# Altium PCB PCB_涂鸦拓展板_2021-06-02.pcbdoc
Units mil, origin at the board's own origin, x right, y up, seen from the top; angles counter-clockwise.
Board outline 3970 x 3137.5 mil, 2 copper layers (Top Layer, Bottom Layer); 29 components, 20 nets, 117 pads, 12 vias.
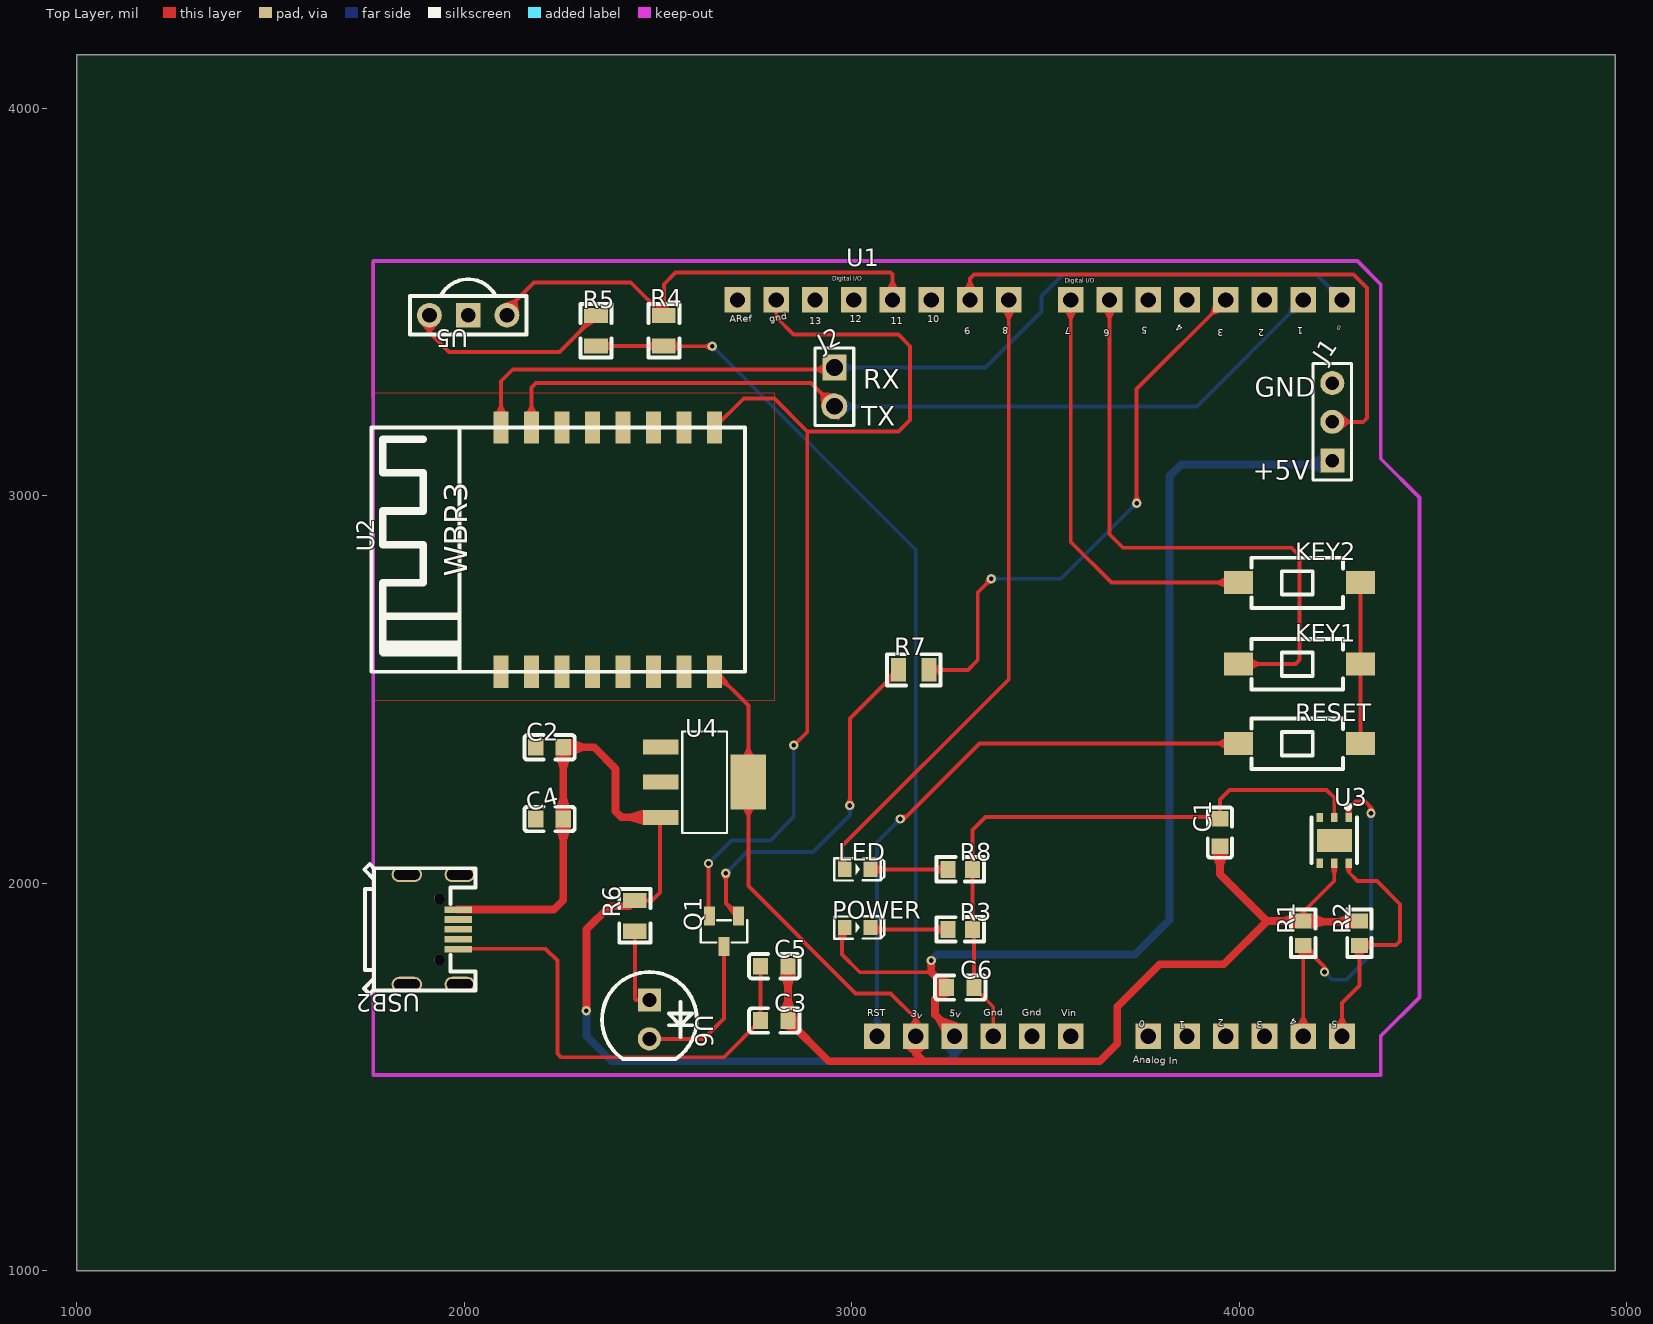
[diagram p0: Top Layer view]
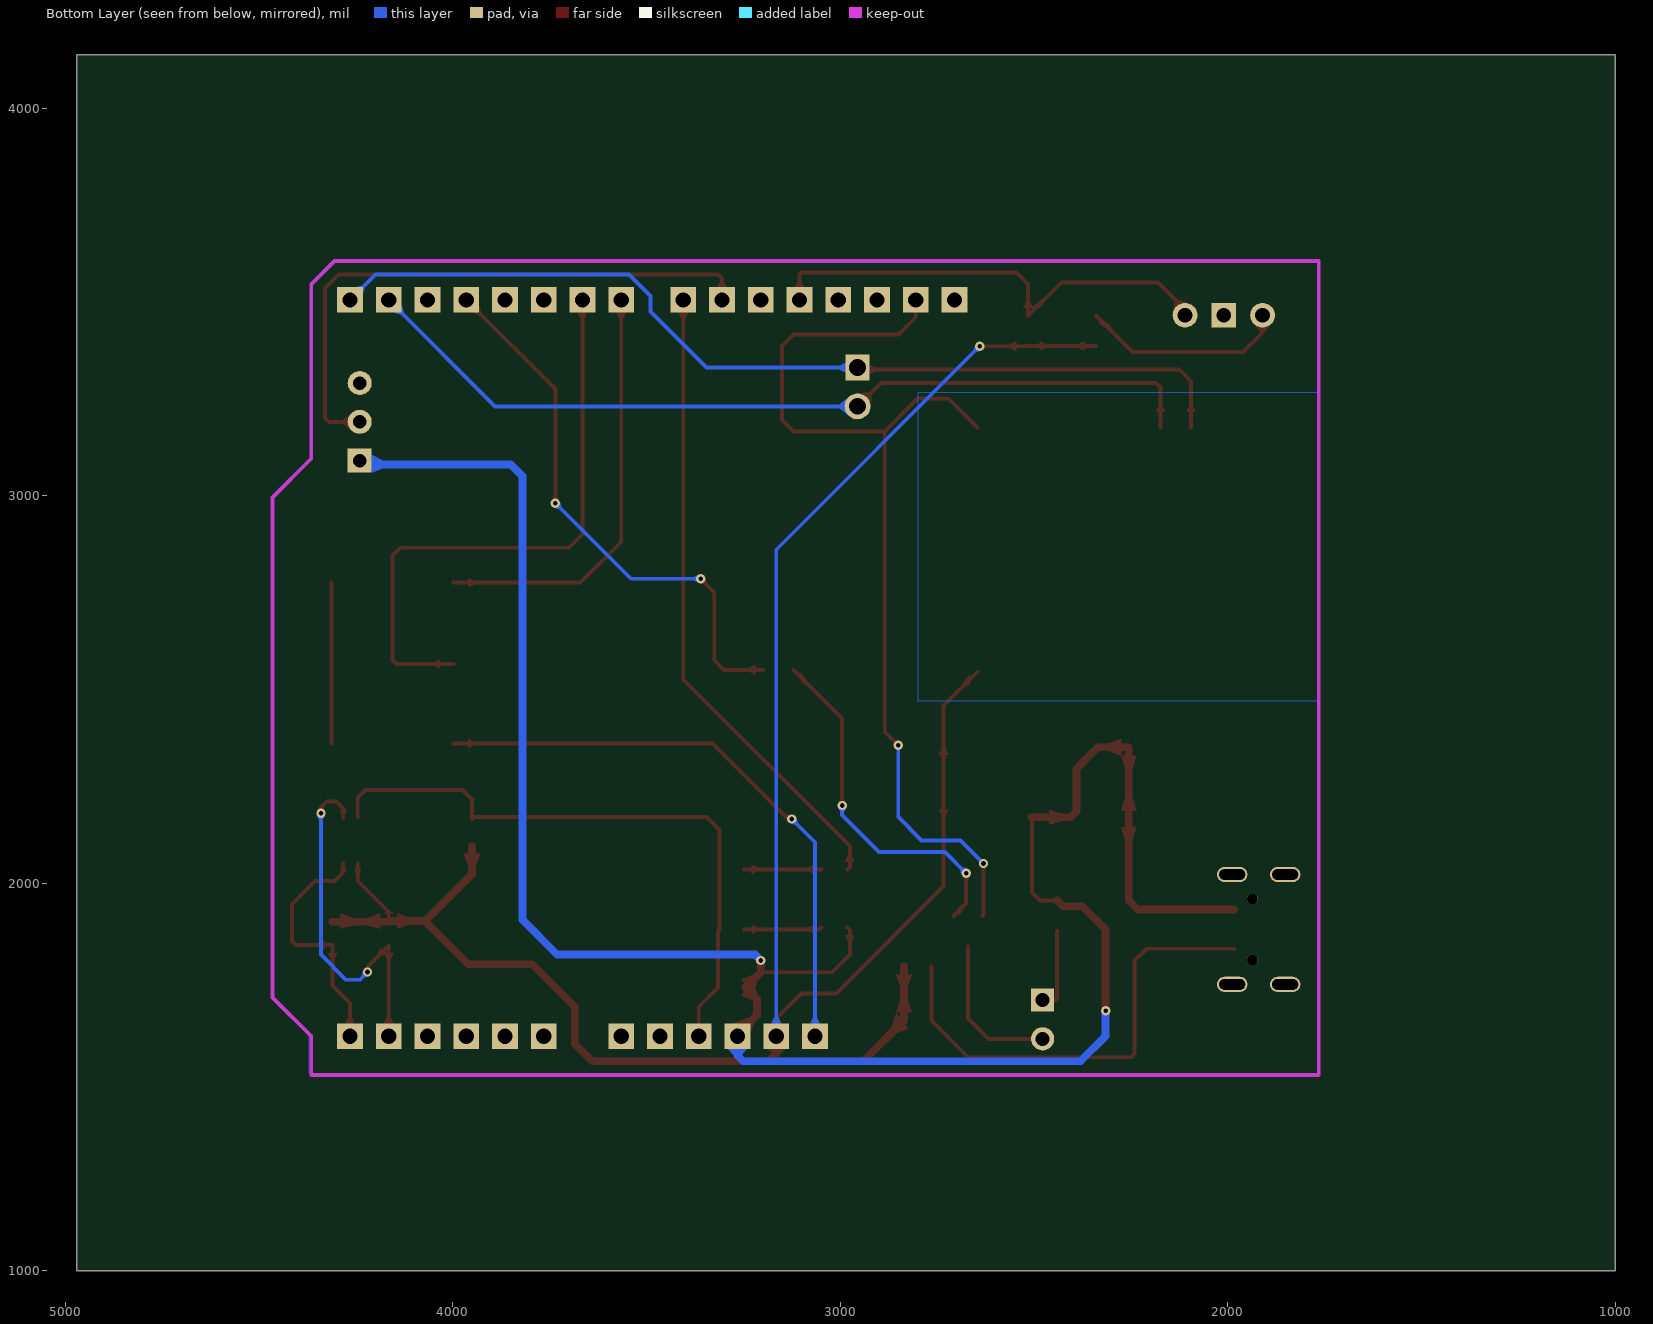
[diagram p1: Bottom Layer view, seen from below]

## Layer stack, top to bottom
Top Layer: signal copper (thickness not stored)
Dielectric: dielectric 12.6, FR-4, Dk 4.8
Bottom Layer: signal copper (thickness not stored)

## Board outline
4970,1000 1000,1000 1000,4137.5 4970,4137.5

## Components (designator, comment, footprint, x,y, rotation, side; value= is the part's Value field where it differs from the comment)
C1 "100nf" C0603 3950,2130.4 r90 top
C2 "100nf" C0603 2220,2350.4 r0 top
C3 "100nf" C0603 2800,1645.4 r0 top
C4 "10uf" C0603 2220,2165.4 r0 top
C5 "10uf" C0603 2800,1785.4 r0 top
C6 "100nf" C0603 3280,1730.4 r0 top
J1 "HDR-M-2.54_1x3" HDR-M-2.54_1X3 4240,3190.4 r90 top
J2 "HDR-M-2.54_1x2" HDR-M-2.54_1X2 2955,3280.4 r270 top
KEY1 "TS-1101-C-W" SW-SMD_L6.0-W3.3-LS8.0 4155,2565.4 r0 top
KEY2 "TS-1101-C-W" SW-SMD_L6.0-W3.3-LS8.0 4155,2775.4 r0 top
LED "LED-0603_G" LED0603_GREEN 3015,2035.4 r0 top
POWER "LED-0603_R" LED0603_RED 3015,1885.4 r0 top
Q1 "SS8050_C746284" SOT-23-3_L2.9-W1.3-P1.90-LS2.4-BR 2670,1875.4 r90 top
R1 "4.7k" R0603 4165,1870.4 r90 top
R2 "4.7k" R0603 4310,1870.4 r90 top
R3 "4.7k" R0603 3280,1880.4 r0 top
R4 "10K" R0805 2515,3425.4 r90 top
R5 "120" R0805 2340,3425.4 r270 top
R6 "120" R0805 2440,1915.4 r90 top
R7 "4.7k" R0805 3160,2550.4 r180 top
R8 "4.7k" R0603 3280,2035.4 r0 top
RESET "TS-1101-C-W" SW-SMD_L6.0-W3.3-LS8.0 4155,2360.4 r0 top
U1 "ARDUINO" ARDUINO 1765,1505 r0 top
U2 "WBR3" WBR3 2705,2545.4 r90 top
U3 "SHT20" DFN-6_L3.0-W3.0-P0.95-TR-EP 4245,2110.4 r0 top
U4 "AMS1117-3.3" SOT-223-3_L6.5-W3.4-P2.30-LS7.0-BR 2620,2260.4 r180 top
U5 "HX1838" HX1838 2010,3465.4 r180 top
U6 "红外发射管5mm" 123 2480,1650.4 r270 top
USB2 "U-F-M5DD-Y-1" MICRO-USB-SMD_U-F-M5DD-Y-1 1920,1880.4 r180 top

## Footprints (in the part's own frame and the unit in brackets; to place one, negate y for a bottom-side part, rotate by r counter-clockwise, add the part's x,y. Pads: shape width x height; smd on the part's side, far side on the other; paste and mask are expansions set on the pad)
123 [mil]
  rect 60x60 hole 36: 1(-47.64,-2.34)
  round 60 hole 36: 2(52.36,-2.34)
  silkscreen extent -120,-125 105,120
ARDUINO [mil]
  rect 66x66 hole 39.4: 3V(1400,100) 5V(1500,100) A0(2000,100) A1(2100,100) A2(2200,100) A3(2300,100) A4(2400,100) A5(2500,100) AREF(940,2000) D0(2500,2000) D1(2400,2000) D2(2300,2000) D3(2200,2000) D4(2100,2000) D5(2000,2000) D6(1900,2000) D7(1800,2000) D8(1640,2000) D9(1540,2000) D10(1440,2000) D11(1340,2000) D12(1240,2000) D13(1140,2000) GND(1040,2000) GND1(1700,100) GND2(1600,100) RESET(1300,100) VIN(1800,100)
  Keep-Out Layer lines w10: 0,0 2600,0 2600,100 2700,200 2700,1490 2600,1590 2600,2040 2540,2100 0,2100 0,0
C0603 [mm]
  rect 1x1.1 smd: 1(-0.9,0) 2(0.9,0)
  silkscreen extent -1.65,-0.8 1.65,0.8
DFN-6_L3.0-W3.0-P0.95-TR-EP [mm]
  rect 0.4x0.6 smd: 1(0.95,1.502) 2(0,1.501) 3(-0.95,1.5) 4(-0.95,-1.501) 5(0,-1.502) 6(0.95,-1.501)
  rect 2.3x1.5 smd: 7(0.004,-0.001)
  silkscreen extent -1.5,-1.5 1.5,2.34
HDR-M-2.54_1X2 [mm]
  rect 1.7x1.575 hole 1.1: 1(-1.27,0)
  round 1.7 hole 1.1: 2(1.27,0)
  silkscreen extent -2.54,-1.27 2.54,1.27
HDR-M-2.54_1X3 [mil]
  rect 62x62 hole 35: 1(-100,0)
  round 62 hole 35: 2(0,0) 3(100,0)
  silkscreen extent -150,-50 150,50
HX1838 [mil]
  round 64 hole 38: 1(-100,0) 3(100,0)
  rect 64x64 hole 38: 2(0,0)
  silkscreen extent -150,-93 150,50
LED0603_GREEN [mm]
  rect 0.9x1 smd: 1(-0.85,0) 2(0.85,0)
  silkscreen extent -1.54,-0.73 1.75,0.73
LED0603_RED [mm]
  rect 0.9x1 smd: 1(-0.85,0) 2(0.85,0)
  silkscreen extent -1.54,-0.73 1.75,0.73
MICRO-USB-SMD_U-F-M5DD-Y-1 [mm]
  rect 1.8x0.43 smd: 1(-1.626,-1.3) 2(-1.626,-0.65) 3(-1.626,0) 4(-1.626,0.65) 5(-1.626,1.3)
  oval 2x1 hole 0.7 slot 1.7 at 0 deg: 6(-1.735,3.599) 7(1.735,3.6) 8(-1.735,-3.599) 9(1.735,-3.6)
  round 0.7 hole 0.7 unplated: ""(-0.415,2) ""(-0.415,-2)
  silkscreen extent -2.77,-4.28 4.55,4.22
R0603 [mm]
  rect 1x1.1 smd: 1(-0.8,0) 2(0.8,0)
  silkscreen extent -1.55,-0.8 1.55,0.81
R0805 [mm]
  rect 1x1.55 smd: 1(-1,0) 2(1,0)
  silkscreen extent -1.75,-1.02 1.75,1.02
SOT-23-3_L2.9-W1.3-P1.90-LS2.4-BR [mm]
  rect 1.25x0.7 smd: 1(1,-0.95) 2(1,0.95) 3(-1,0)
  silkscreen extent -0.73,-1.53 0.73,1.53
SOT-223-3_L6.5-W3.4-P2.30-LS7.0-BR [mm]
  rect 2.34x0.98 smd: 1(2.87,-2.3) 2(2.87,0) 3(2.87,2.3)
  rect 2.34x3.6 smd: 4(-2.87,0)
  silkscreen extent -1.47,-3.33 1.47,3.33
SW-SMD_L6.0-W3.3-LS8.0 [mm]
  rect 1.9x1.5 smd: 1(-4,0) 2(4,0)
  silkscreen extent -3.14,-1.67 2.86,1.63
WBR3 [mm]
  rect 2.1x1 smd: 1(0,15.5) 2(0,13.5) 3(0,11.5) 4(0,9.5) 5(0,7.5) 6(0,5.5) 7(0,3.5) 8(0,1.5) 9(16,1.5) 10(16,3.5) 11(16,5.5) 12(16,7.5) 13(16,9.5) 14(16,11.5) 15(16,13.5) 16(16,15.5)
  silkscreen extent 0,-0.5 16,24

## Via types
v1: diameter 24, hole 12, Top Layer to Bottom Layer, 12 vias

## Nets (pads, with @x,y where several pads share a name; then routed paths per layer and width w, separated by ;. In a path a pad name is that pad's centre, name@x,y a point inside that pad or via, vN(x,y) a via of type N, cw(c..) or ccw(c..) an arc to the next point about the centre after c; other vN are vias at no path point)
+3.3V: C1.1 C3.2 C5.2 R1.2 R2.2 R4.1 R5.2 U1.3V U2.8 U3.5 U4.4 | length 5882.7
  Top Layer w10: R5.2 R4.1 2515.6,3385.4 v1(2640,3385.4) ; U2.8@2646,2545.4 2733,2458.4 U4.4 2733,1992.4 3010,1715.4 3100,1715.4 3165,1650.4 U1.3V ; R1.2 4165,1925.4 4245,2005.4 U3.5
  Top Layer w20: C5.2 C3.2 2940.4,1540.4 3199.2,1540.4 ; U1.3V 3165,1560.4 3185,1540.4 3640,1540.4 3685,1585.4 3685,1680.4 3795,1790.4 3960,1790.4 4071.5,1901.9 ; C1.1 3950,2023.4 4071.5,1901.9 ; R1.2@4165,1900.4 R2.2@4310,1900.4 ; R1.2 4071.5,1901.9
  Bottom Layer w10: v1(2640,3385.4) 3165,2860.4 U1.3V
+5V: C2.2 C4.2 C6.1 J1.1 POWER.1 R6.2 U1.5V U4.3 USB2.1 | length 5605.3
  Top Layer w10: R6.2 2484.37,1954.77 2505,1975.4 2505,2167.84 U4.3@2507.01,2169.85 ; POWER.1 2975,1878.9 2975,1815.4 3020.4,1770 3205,1770
  Top Layer w20: USB2.1 2231.2,1931.6 2255,1955.4 C4.2 C2.2 2335,2350.4 2390,2295.4 2390,2185.4 2405.6,2169.9 U4.3@2507,2169.9 ; v1(2315,1670.4) 2315,1880.4 2375,1940.4 2425.63,1940.4 R6.2 ; v1(3205,1800.4) 3205,1770 C6.1 3215,1700.8 3215,1660.4 3265,1610.4 U1.5V
  Bottom Layer w20: v1(2315,1670.4) 2315,1605.4 2380,1540.4 3250,1540.4 3265,1555.4 U1.5V ; v1(3205,1800.4) 3220,1815.4 3730,1815.4 3820,1905.4 3820,3050.4 3850,3080.4 4230,3080.4 J1.1
DATA: J1.2 U1.D9 | length 1528.2
  Top Layer w10: U1.D9 3305,3560.4 3315,3570.4 4295,3570.4 4330,3535.4 4330,3200.4 4320,3190.4 J1.2
EMIT: R7.1 U1.D3 | length 1436.1
  Top Layer w10: R7.1 3300,2550.4 3325,2575.4 3325,2750.4 v1(3360,2785.4) ; v1(3735,2980.4) 3735,3275 U1.D3
  Bottom Layer w10: v1(3360,2785.4) 3540,2785.4 v1(3735,2980.4)
GND: C1.2 C2.1 C3.1 C4.1 C5.1 C6.2 J1.3 KEY1.2 KEY2.2 Q1.2 R3.2 R8.2 RESET.2 U1.GND U1.GND1 U1.GND2 U2.9 U3.2 U4.1 U5.2 USB2.5 | length 5863.8
  Top Layer w10: USB2.5 1985.21,1830.4 2210,1830.4 2240,1800.4 2240,1560.4 2250,1550.4 2669.57,1550.4 C3.1 C5.1 ; v1(2630,2050.4) 2630,1995.4 2630,1917.37 Q1.2 ; U2.9@2645.95,3175.32 2721.03,3250.4 2800,3250.4 2885,3165.4 ; U1.GND 2805,3460.4 2850,3415.4 3120,3415.4 3150,3385.4 3150,3195.4 3120,3165.4 2885,3165.4 ; v1(2850,2355.4) 2885,2390.4 2885,3165.4 ; U1.GND2 3365,1680.84 C6.2 3315.43,1876.46 R3.2 R8.2 3311.49,2136.89 3345,2170.4 3945.43,2170.4 C1.2 3950,2215.4 3975,2240.4 4225,2240.4 4245,2220.4 U3.2 ; RESET.2 KEY1.2 KEY2.2
  Bottom Layer w10: v1(2630,2050.4) 2690,2110.4 2790,2110.4 2850,2170.4 v1(2850,2355.4)
KEY1: KEY1.1 U1.D6 | length 1549
  Top Layer w10: U1.D6 3665,2900.4 3700,2865.4 4135,2865.4 4155,2845.4 4155,2575.4 4145,2565.4 KEY1.1
KEY2: KEY2.1 U1.D7 | length 1100.6
  Top Layer w10: U1.D7 3565,2880.4 3670,2775.4 KEY2.1
LED: LED.1 U1.D8 | length 1650.4
  Top Layer w10: LED.1 2975,2041.9 2975,2095.4 3405,2525.4 U1.D8
LED1_2: POWER.2 R3.1 | length 202.1
  Top Layer w10: POWER.2 3053.5,1880.4 R3.1
R5_1: R5.1 U5.3 | length 534.8
  Top Layer w10: U5.3 1910,3420.4 1960,3370.4 2245.6,3370.4 R5.1
R6_1: R6.1 U6.1 | length 214.3
  Top Layer w10: R6.1 2440,1700.4 2442.36,1698.04 U6.1
R7_2: Q1.1 R7.2 | length 933.2
  Top Layer w10: v1(2675,2025.4) 2675,1947.2 Q1.1 ; v1(2995,2200.4) 2995,2424.8 R7.2
  Bottom Layer w10: v1(2675,2025.4) 2730,2080.4 2900,2080.4 2995,2175.4 v1(2995,2200.4)
R8_1: LED.2 R8.1 | length 200
  Top Layer w10: LED.2 R8.1
REC: R4.2 U1.D11 U5.1 | length 1234.9
  Top Layer w10: U5.1 2110,3480.4 2180,3550.4 2429.4,3550.4 R4.2 2515,3545.4 2545,3575.4 3100,3575.4 3105,3570.4 U1.D11
RESET: RESET.1 U1.RESET | length 1538.5
  Top Layer w10: v1(3125,2165.4) 3135,2165.4 3330,2360.4 RESET.1
  Bottom Layer w10: U1.RESET 3065,2105.4 v1(3125,2165.4)
RX: J2.1 U1.D0 U2.16 | length 2454.6
  Top Layer w10: U2.16 2094.8,3295.2 2125,3325.4 2950,3325.4 J2.1
  Bottom Layer w10: J2.1 3345,3330.4 3490,3475.4 3490,3515.4 3545,3570.4 4199.6,3570.4 U1.D0
SCL: R2.1 U1.A5 U3.6 | length 647.4
  Top Layer w10: U1.A5 4265,1690.4 4310,1735.4 R2.1 4311.5,1840.4 4405,1840.4 4415,1850.4 4415,1945.4 4355,2005.4 4305,2005.4 4282.4,2028 U3.6
SDA: R1.1 U1.A4 U3.1 | length 954.8
  Top Layer w10: U1.A4 R1.1 4220,1783.9 v1(4220,1770.4) ; U3.1 4282.4,2192.8 4300,2210.4 4325,2210.4 4340,2195.4 v1(4340,2180.4)
  Bottom Layer w10: v1(4220,1770.4) 4240,1750.4 4275,1750.4 4340,1815.4 v1(4340,2180.4)
TX: J2.2 U1.D1 U2.15 | length 2272.6
  Top Layer w10: U2.15 2173.5,3278.9 2185,3290.4 2895,3290.4 J2.2 2955,3210.4 J2.2@2965,3200.4
  Bottom Layer w10: J2.2 3890.4,3230.4 U1.D1
U6_2: Q1.3 U6.2 | length 399.7
  Top Layer w10: U6.2 2617.64,1598.04 2670,1650.4 Q1.3
pads on no net: U1.A0 U1.A1 U1.A2 U1.A3 U1.AREF U1.D2 U1.D4 U1.D5 U1.D10 U1.D12 U1.D13 U1.VIN U2.1 U2.2 U2.3 U2.4 U2.5 U2.6 U2.7 U2.10 U2.11 U2.12 U2.13 U2.14 U3.3 U3.4 U3.7 U4.2 USB2. USB2.2 USB2.3 USB2.4 USB2.6 USB2.7 USB2.8 USB2.9

## Polygon pours and split planes (outlines as drawn)
GND on Top Layer (solid): 1765,3605.4 1760,3600.4 1760,3255.4 1770,3265.4 2800,3265.4 2800,2470.4 1765,2470.4 1765,1505.4 4365,1505.4 4365,1605.4 4465,1705.4 4465,2995.4 4365,3095.4 4365,3545.4 4305,3605.4 1765,3605.4
GND on Bottom Layer (solid): 1765,3605.4 1765,3265.4 2800,3265.4 2800,2470.4 1765,2470.4 1765,1510.4 1770,1505.4 4365,1505.4 4370,1510.4 4370,1605.4 4465,1700.4 4465,1705.4 4465,3000.4 4370,3095.4 4365,3095.4 4365,3550.4 4310,3605.4 4305,3605.4 1765,3605.4

## Other copper
Top Layer:
  region net REC: 2141.46,3471.23 2100.28,3495.89 2127.96,3505.43 2136.8,3500.13
  region net R5_1: 1934,3444.23 1886,3444.23 1905,3421.83 1915,3421.83
  region net TX: 2921.6,3228.3 2957.1,3263.8 2926.32,3266.15 2919.25,3259.08
  region net DATA: 4260.5,3167.15 4260.5,3213.65 4282.2,3195.4 4282.2,3185.4
  region net SDA: 4331,2188.34 4349,2188.34 4345,2195.4 4335,2195.4
  region net EMIT: 3360.75,2773.42 3348.02,2786.15 3344.91,2777.38 3351.98,2770.31
  region net EMIT: 3726,2988.34 3744,2988.34 3740,2996.74 3730,2996.74
  region net RESET: 3135.47,2159.54 3129.51,2176.52 3138.58,2176.05 3142.25,2165.58
  region net R7_2: 2986,2208.34 3004,2208.34 3000,2216.74 2990,2216.74
  region net R7_2: 2666,2017.46 2684,2017.46 2680,2009.06 2670,2009.06
  region net +5V: 3196,1792.46 3214,1792.46 3215,1784.06 3195,1784.06
  region net +3.3V: 2632.06,3376.4 2632.06,3394.4 2623.66,3390.4 2623.66,3380.4
  region net SDA: 4211,1778.34 4229,1778.34 4225,1783.91 4215,1783.91
  region net LED1_2: 3066.18,1892.9 3066.18,1867.9 3081.18,1875.4 3081.18,1885.4
  region net +5V: 2987.5,1865.71 2963.82,1865.71 2970,1850.71 2980,1850.71
  region net +3.3V: 2665.63,2538.22 2665.63,2513.22 2680.63,2503.65 2680.63,2517.79
  region net RX: 2082.27,3216.66 2107.27,3216.66 2099.77,3231.66 2089.77,3231.66
  region net TX: 2161.01,3216.66 2186.01,3216.66 2178.51,3231.66 2168.51,3231.66
  region net +3.3V: 2815.75,1667.05 2855.12,1667.05 2845.43,1697.05 2825.43,1697.05
  region net +3.3V: 2855.12,1663.63 2824.97,1623.75 2854.13,1612.57 2866.3,1628.67
  region net +5V: 3255.04,1708.75 3224.88,1748.63 3213.7,1713.67 3225.88,1697.57
  region net +5V: 3224.88,1712.17 3255.04,1752.05 3225.88,1763.23 3213.7,1747.13
  region net +3.3V: 3971.66,2075.28 3928.34,2075.28 3940,2045.28 3960,2045.28
  region net +5V: 2275.12,2328.75 2235.75,2328.75 2245.43,2298.75 2265.43,2298.75
  region net +5V: 2275.12,2372.05 2275.12,2328.75 2305.12,2340.4 2305.12,2360.4
  region net +3.3V: 2855.12,1763.75 2815.75,1763.75 2825.43,1733.75 2845.43,1733.75
  region net +5V: 2275.12,2143.75 2235.75,2143.75 2245.33,2113.75 2265.33,2113.75
  region net +5V: 2235.75,2187.05 2275.12,2187.05 2265.43,2217.05 2245.43,2217.05
  region net R7_2: 2693.62,1916.05 2693.62,1939.38 2678.62,1950.62 2678.62,1936.48
  region net KEY2: 3960.12,2762.9 3960.12,2787.9 3945.12,2780.4 3945.12,2770.4
  region net RESET: 3960.12,2347.9 3960.12,2372.9 3945.12,2365.4 3945.12,2355.4
  region net KEY1: 4034.92,2577.9 4034.92,2552.9 4049.92,2560.4 4049.92,2570.4
  region net RX: 2924,3312.9 2924,3337.9 2909,3330.4 2909,3320.4
  region net +3.3V: 4288.34,1882.21 4288.34,1921.58 4258.34,1910.4 4258.34,1890.4
  region net SCL: 4322.5,1819.22 4297.5,1819.22 4305,1804.22 4315,1804.22
  region net SCL: 4331.66,1852.9 4331.66,1827.9 4346.66,1835.4 4346.66,1845.4
  region net LED1_2: 3228.82,1867.9 3228.82,1892.9 3213.82,1885.4 3213.82,1875.4
  region net R8_1: 3228.82,2022.9 3228.82,2047.9 3213.82,2040.4 3213.82,2030.4
  region net +3.3V: 4152.5,1921.58 4177.5,1921.58 4170,1925.4 4160,1925.4
  region net +3.3V: 4186.66,1921.58 4186.66,1882.21 4216.66,1890.4 4216.66,1910.4
  region net +3.3V: 4143.34,1882.21 4143.34,1921.58 4113.34,1911.9 4113.34,1891.9
  region net SDA: 4186.66,1831.51 4164.88,1819.22 4184.03,1812.8 4193.07,1817.9
  region net SDA: 4177.5,1819.22 4152.5,1819.22 4160,1804.22 4170,1804.22
  region net +5V: 2460.95,2189.14 2460.95,2150.56 2430.95,2159.85 2430.95,2179.85
  region net +3.3V: 2745.49,2189.53 2720.49,2189.53 2727.99,2174.53 2737.99,2174.53
  region net +3.3V: 2720.49,2331.27 2745.49,2331.27 2737.99,2346.27 2727.99,2346.27
  region net R8_1: 3066.17,2047.9 3066.17,2022.9 3081.17,2030.4 3081.17,2040.4
  region net LED: 2963.81,2055.09 2987.5,2055.09 2980,2070.09 2970,2070.09
  region net R7_2: 3100.95,2519.89 3100.95,2543.22 3085.95,2522.79 3085.95,2508.65
  region net EMIT: 3219.05,2562.9 3219.05,2537.9 3234.05,2545.4 3234.05,2555.4
  region net +3.3V: 2370.51,3398.53 2370.51,3373.53 2385.51,3381.03 2385.51,3391.03
  region net R5_1: 2332.81,3445.09 2309.49,3445.09 2298.24,3430.09 2312.39,3430.09
  region net REC: 2502.5,3484.46 2527.5,3484.46 2520,3499.46 2510,3499.46
  region net REC: 2484.49,3484.46 2507.81,3484.46 2487.39,3499.46 2473.24,3499.46
  region net +3.3V: 2545.51,3397.9 2545.51,3372.9 2560.51,3380.4 2560.51,3390.4
  region net +3.3V: 2484.49,3373.53 2484.49,3398.53 2469.49,3391.03 2469.49,3381.03
  region net SDA: 4274.53,2181.35 4290.27,2181.35 4287.4,2192.8 4277.4,2192.8
  region net SCL: 4290.27,2039.5 4274.53,2039.5 4277.4,2028 4287.4,2028
  region net +3.3V: 4252.87,2039.45 4237.13,2039.45 4240,2024.45 4250,2024.45
  region net EMIT: 3949.67,3472 3932,3489.68 3926.7,3473.77 3933.77,3466.7
  region net KEY1: 3677.5,3472 3652.5,3472 3660,3457 3670,3457
  region net KEY2: 3577.5,3472 3552.5,3472 3560,3457 3570,3457
  region net LED: 3417.5,3472 3392.5,3472 3400,3457 3410,3457
  region net DATA: 3292.5,3538 3317.5,3538 3310,3553 3300,3553
  region net REC: 3092.5,3538 3117.5,3538 3110,3553 3100,3553
  region net SDA: 4152.5,1638 4177.5,1638 4170,1653 4160,1653
  region net SCL: 4252.5,1638 4277.5,1638 4270,1653 4260,1653
  region net +5V: 3232,1617.58 3277.64,1638 3236.9,1652.64 3217.36,1643.89
  region net +3.3V: 3152.5,1638 3177.5,1638 3170,1650.4 3160,1650.4
  region net +3.3V: 3190,1572 3140,1572 3155,1560.4 3175,1560.4
Bottom Layer:
  region net TX: 2977.13,3205.3 2977.13,3255.5 3000.56,3235.4 3000.56,3225.4
  region net SDA: 4331,2172.46 4349,2172.46 4345,2164.06 4335,2164.06
  region net EMIT: 3367.94,2776.4 3367.94,2794.4 3376.34,2790.4 3376.34,2780.4
  region net EMIT: 3735.75,2968.42 3723.02,2981.15 3719.91,2972.38 3726.98,2965.31
  region net RESET: 3125.75,2153.42 3113.02,2166.15 3109.91,2157.38 3116.98,2150.31
  region net R7_2: 2986,2192.46 3004,2192.46 3000,2184.06 2990,2184.06
  region net R7_2: 2686.98,2024.65 2674.25,2037.38 2683.02,2040.49 2690.09,2033.42
  region net +5V: 2306,1662.46 2324,1662.46 2325,1654.06 2305,1654.06
  region net +5V: 3216.98,1799.65 3204.25,1812.38 3209.48,1819.02 3223.62,1804.88
  region net +3.3V: 2651.98,3386.15 2639.25,3373.42 2648.02,3370.31 2655.09,3377.38
  region net SDA: 4231.98,1771.15 4219.25,1758.42 4228.02,1755.31 4235.09,1762.38
  region net RX: 2986,3342.9 2986,3317.9 3001,3325.4 3001,3335.4
  region net +5V: 4209,3059.4 4209,3105.4 4179,3090.4 4179,3070.4
  region net TX: 4149.67,3472 4132,3489.68 4126.7,3473.77 4133.77,3466.7
  region net RX: 4232,3520.32 4249.67,3538 4233.77,3543.3 4226.7,3536.23
  region net +5V: 3290,1572 3240,1572 3255,1555.4 3275,1555.4
  region net +3.3V: 3152.5,1638 3177.5,1638 3170,1653 3160,1653
  region net RESET: 3052.5,1638 3077.5,1638 3070,1653 3060,1653

## Silkscreen, mask and mechanical layers (free items; w line width, h text height)
Top Overlay:
  text "RX" at 3030,3275.4 h50
  text "GND" at 4040,3255.4 h50
  text "TX" at 3025,3180.4 h50
  text "+5V" at 4035,3040.4 h50
  text "Gnd" at 3440,1650.4 h30 r2

## Text inside footprints (layer, text, board x,y; h text height)
U1: Top Overlay "RST" at 3040,1650.4 h30; Top Overlay "3v" at 3150,1650.4 h30 r345; Top Overlay "5v" at 3250,1650.4 h30 r352; Top Overlay "Gnd" at 3340,1650.4 h30 r2; Top Overlay "Vin" at 3540,1650.4 h30; Top Overlay "Analog In" at 3725,1530.4 h30 r358; Top Overlay "0" at 3760,1650.4 h30 r167; Top Overlay "1" at 3860,1650.4 h30 r180; Top Overlay "2" at 3960,1655.4 h30 r180; Top Overlay "3" at 4060,1650.4 h30 r178; Top Overlay "4" at 4155,1650.4 h30 r145; Top Overlay "5" at 4255,1650.4 h30 r172; Top Overlay "ARef" at 2685,3440.4 h30 r1; Top Overlay "gnd" at 2790,3440.4 h30 r10; Top Overlay "13" at 2890,3435.4 h30 r359; Top Overlay "12" at 2995,3440.4 h30; Top Overlay "11" at 3100,3435.4 h30; Top Overlay "10" at 3195,3440.4 h30 r359; Top Overlay "9" at 3305,3440.4 h30 r186; Top Overlay "8" at 3405,3440.4 h30 r177; Top Overlay "7" at 3565,3440.4 h30 r180; Top Overlay "6" at 3665,3435.4 h30 r184; Top Overlay "5" at 3765,3440.4 h30 r172; Top Overlay "4" at 3860,3440.4 h30 r145; Top Overlay "3" at 3960,3435.4 h30 r178; Top Overlay "2" at 4065,3435.4 h30 r180; Top Overlay "1" at 4165,3440.4 h30 r180; Top Overlay "0" at 4265,3440.4 h20 r166; Top Overlay "Digital I/O" at 2950,3550.4 h20; Top Overlay "Digital I/O" at 3550,3545.4 h20